# Altium PCB ver40mil_2023-06-10.pcbdoc
Units mil, origin at the board's own origin, x right, y up, seen from the top; angles counter-clockwise.
Board outline 4425 x 3222.33 mil, 2 copper layers (Top Layer, Bottom Layer); 20 components, 23 nets, 98 pads, 10 vias.
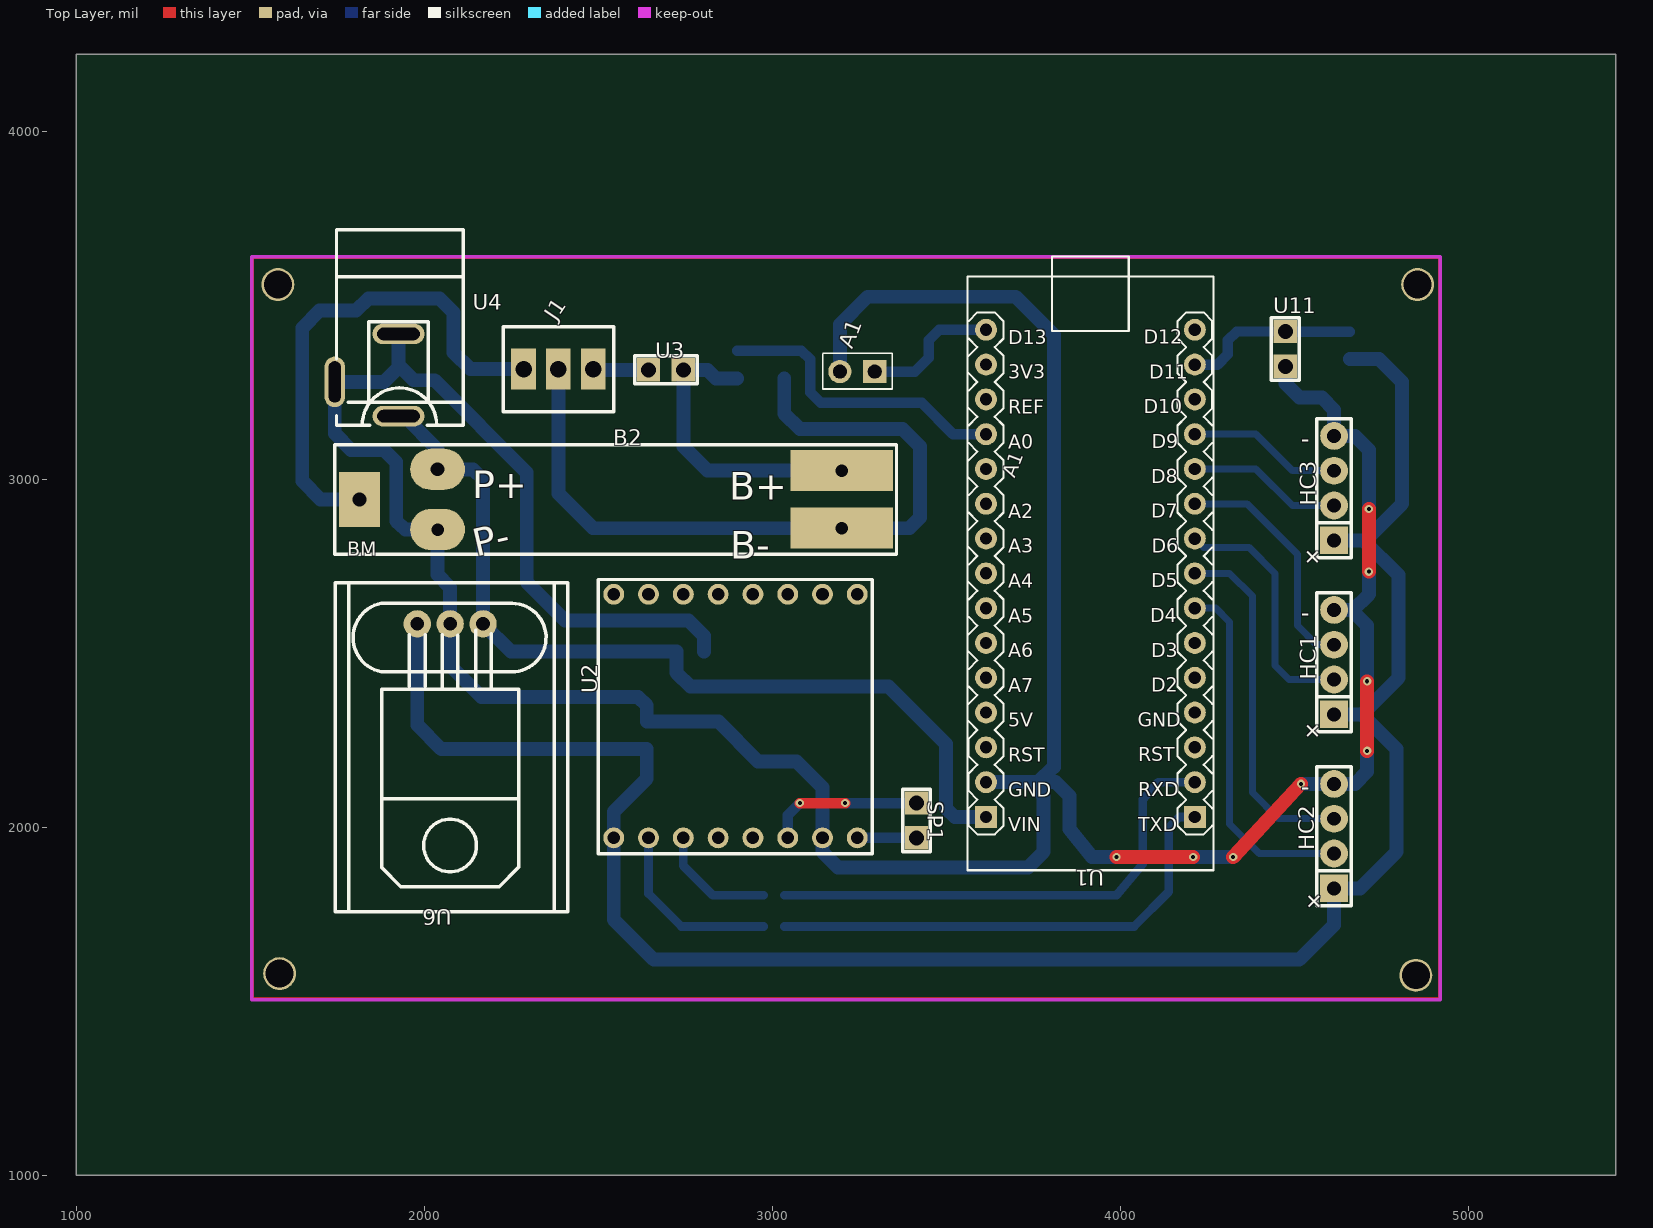
[diagram p0: Top Layer view]
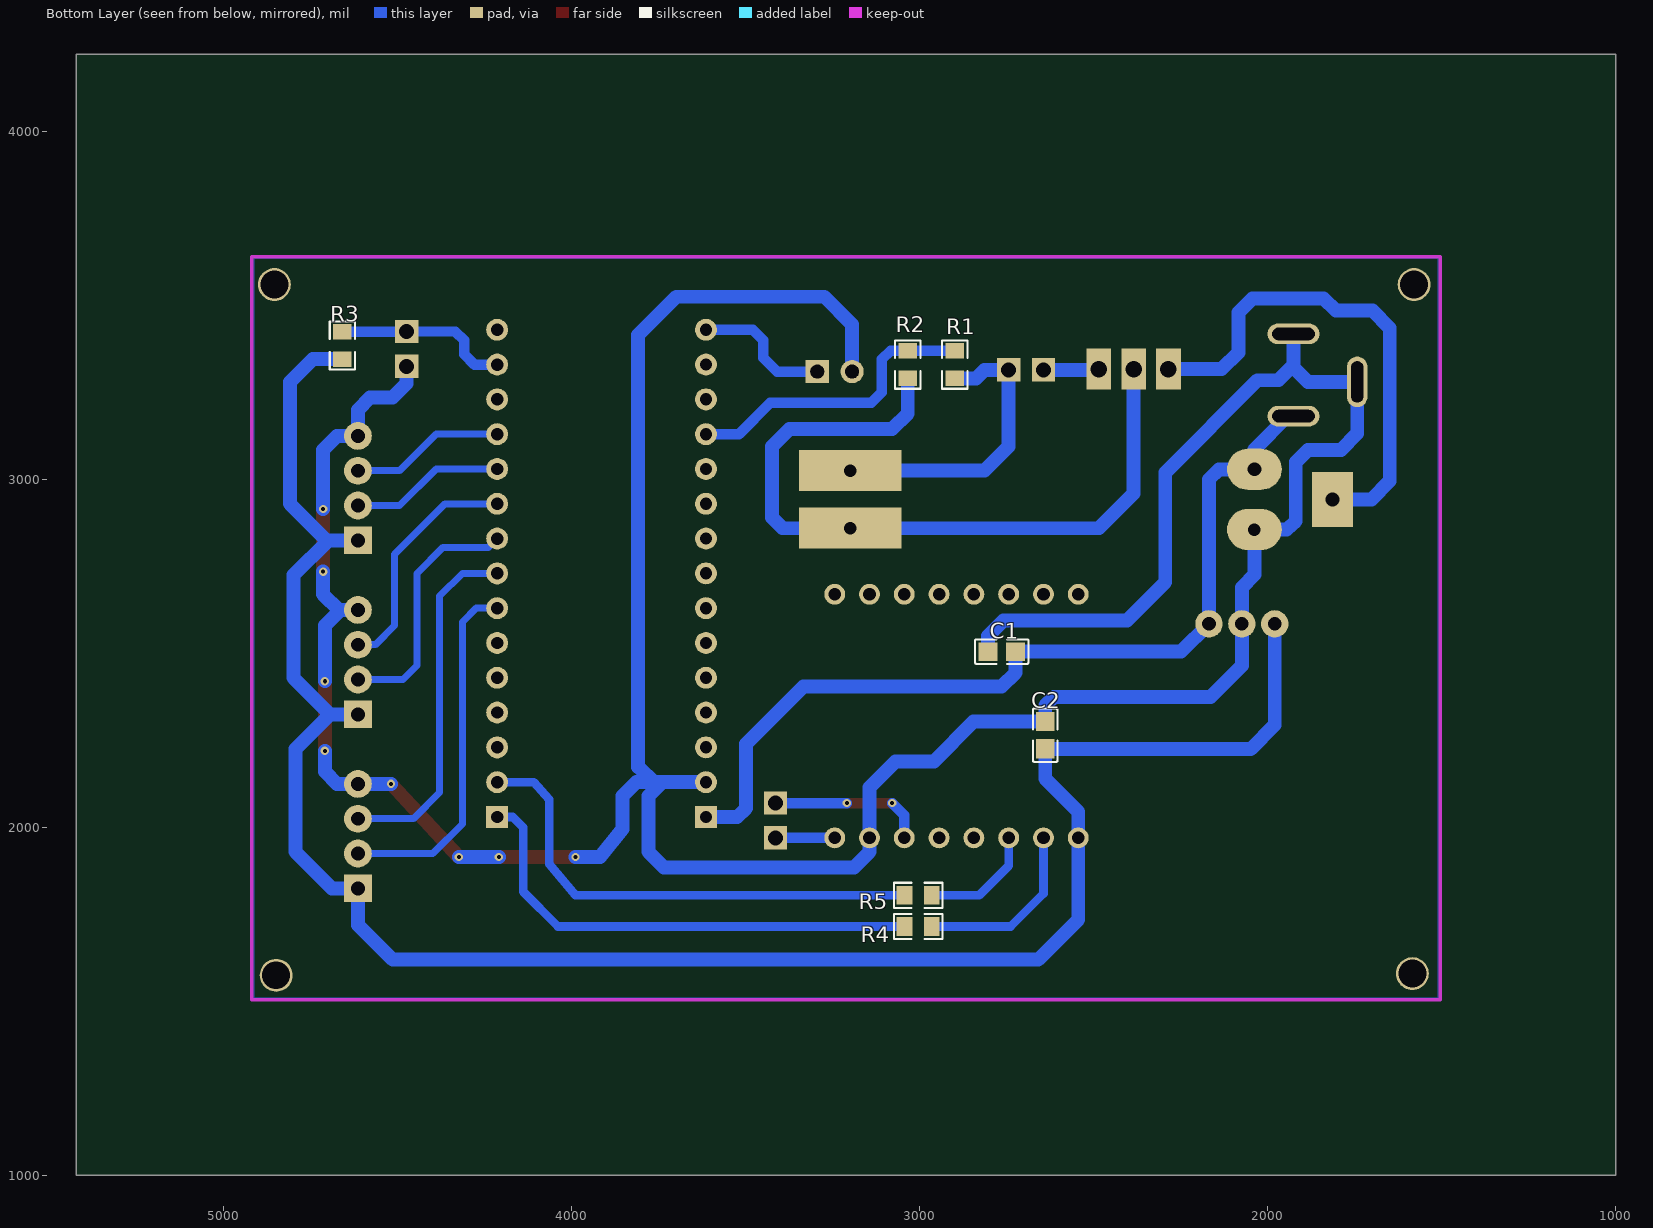
[diagram p1: Bottom Layer view, seen from below]

## Layer stack, top to bottom
Top Layer: signal copper (thickness not stored)
Dielectric: dielectric 12.6, FR-4, Dk 4.8
Bottom Layer: signal copper (thickness not stored)

## Board outline
5425,1000 1000,1000 1000,4222.33 5425,4222.33

## Components (designator, comment, footprint, x,y, rotation, side; value= is the part's Value field where it differs from the comment)
A1 "DCmotor" CONNECTOR_PINHEADER_2.54MM:PINHEADER_1X11_P_2.54MM 3295,3310 r270 top
B2 "Batery Charge Protection HX-2S-A10" HX-2S-A10 1743.45,3100 r0 top
C1 "10u" C0805 2765,2505 r0 bottom
C2 "0.1u" C0805 2640,2265 r90 bottom
HC1 "SR04" JSN-SR04T-3.0_1H 4615,2365 r90 top
HC2 "SR04" JSN-SR04T-3.0_1H 4615,1865 r90 top
HC3 "SR04" JSN-SR04T-3.0_1H 4615,2865 r90 top
J1 "TERM BLK 3P SIDE" "PHOENIX TERM BLK 3P SIDE ENT 2.54MM PCB" 2545,3195 r180 top
R1 "30K" R0805 2900,3330 r90 bottom
R2 "7.5K" R0805 3035,3330 r270 bottom
R3 "4.3K" R0805 4660,3385 r270 bottom
R4 "1k" R0805 3005,1715 r180 bottom
R5 "1k" R0805 3005,1805 r180 bottom
SP1 "5" HEADER 3455,2110 r270 top
U1 "ARDUINO_NANO" COMM-TH_ARDUINO_NANO 3915,2730 r270 top
U2 "DFPlayermini2" DFPLAYER 2895,2320 r90 top
U3 "button" HEADER 2605,3355 r0 top
U4 "POWER-JACK" DC-IN-TH_POWER-JACK 1835,3300 r270 top
U6 "LM7805EEx" LM7805 2075,2585 r180 top
U11 "button" HEADER 4515,3465 r270 top

## Footprints (in the part's own frame and the unit in brackets; to place one, negate y for a bottom-side part, rotate by r counter-clockwise, add the part's x,y. Pads: shape width x height; smd on the part's side, far side on the other; paste and mask are expansions set on the pad)
C0805 [mm]
  rect 1.41x1.35 smd: 1(1,0) 2(-1,0)
  silkscreen extent -1.96,-0.9 1.96,0.9
COMM-TH_ARDUINO_NANO [mm]
  rect 1.6x1.6 hole 0.9: 1(17.78,7.62) 30(17.78,-7.62)
  round 1.6 hole 0.9: 2(15.24,7.62) 3(12.7,7.62) 4(10.16,7.62) 5(7.621,7.62) 6(5.08,7.62) 7(2.541,7.62) 8(0,7.62) 9(-2.539,7.62) 10(-5.08,7.62) 11(-7.619,7.62) 12(-10.16,7.62) 13(-12.699,7.62) 14(-15.24,7.62) 15(-17.78,7.62) 16(-17.78,-7.62) 17(-15.241,-7.62) 18(-12.7,-7.62) 19(-10.161,-7.62) 20(-7.62,-7.62) 21(-5.081,-7.62) 22(-2.54,-7.62) 23(-0.001,-7.62) 24(2.54,-7.62) 25(5.079,-7.62) 26(7.62,-7.62) 27(10.159,-7.62) 28(12.7,-7.62) 29(15.24,-7.62)
  silkscreen extent -23.11,-8.97 21.67,8.97
CONNECTOR_PINHEADER_2.54MM:PINHEADER_1X11_P_2.54MM [mm]
  rect 1.7x1.7 hole 1 slot 1.005 at 0 deg: 1(0,0)
  round 1.7 hole 1 slot 1.005 at 0 deg: 2(0,-2.54)
  silkscreen extent -1.33,-3.8 1.27,1.27
DC-IN-TH_POWER-JACK [mm]
  oval 1.5x3.8 hole 0.9 slot 3.1 at 90 deg: 1(3.001,2.325) 2(-2.999,2.325)
  oval 3.7x1.5 hole 0.9 slot 3 at 0 deg: 3(0.5,-2.325)
  silkscreen extent -10.6,-2.2 3.65,7.05
DFPLAYER [mil]
  round 60 hole 36: 1(-350,350) 2(-350,250) 3(-350,150) 4(-350,50) 5(-350,-50) 6(-350,-150) 7(-350,-250) 8(-350,-350) 9(350,350) 10(350,250) 11(350,150) 12(350,50) 13(350,-50) 14(350,-150) 15(350,-250) 16(350,-350)
  silkscreen extent -395,-392 392,395
HEADER [mil]
  rect 66.93x66.93 hole 43.31: 1(40,-40) 2(140,-40)
  silkscreen extent 0,-80 180,0
HX-2S-A10 [mm]
  oval 4x3 hole 1: 1(7.5,-1.8)
  rect 3x4 hole 1: 2(1.8,-4)
  oval 4x3 hole 0.914: 3(7.5,-6.2)
  rect 7.5x3 hole 0.914: 4(37,-1.9) 5(37,-6.1)
  silkscreen extent 0,-8 41,0
JSN-SR04T-3.0_1H [mil]
  rect 80x80 hole 40: 1(-40,0)
  round 80 hole 40: 2(60,0) 3(160,0) 4(260,0)
  silkscreen extent -90,-50 310,50
LM7805 [mm]
  round 2 hole 1: 1(-2.4,0) 2(0,0) 3(2.4,0)
  silkscreen extent -8.6,-3 8.4,21
"PHOENIX TERM BLK 3P SIDE ENT 2.54MM PCB" [mm]
  rect 1.8x3 hole 1.199: 1(1.5,-3.1) 2(4.04,-3.1)
  rect 1.8x3 hole 1.2: 3(6.58,-3.1)
  silkscreen extent 0,-6.2 8.08,0
R0805 [mil]
  rect 44.59x54.21 smd: 1(39.37,0) 2(-39.37,0)
  silkscreen extent -69,-36 69,36

## Free pads (board coordinates)
  round 94.49 hole 80: 1(1580,3560) 1(1585,1580) 1(4850,1575) 1(4855,3560)

## Via types
v1: diameter 24, hole 12, Top Layer to Bottom Layer, tented both sides, 10 vias

## Nets (pads, with @x,y where several pads share a name; then routed paths per layer and width w, separated by ;. In a path a pad name is that pad's centre, name@x,y a point inside that pad or via, vN(x,y) a via of type N, cw(c..) or ccw(c..) an arc to the next point about the centre after c; other vN are vias at no path point)
A0: R1.1 R2.2 U1.19 | length 869.5
  Bottom Layer w30: R1.1 R2.2 ; R2.2 3084.4,3369.4 3110,3345 3110,3250 3140,3220 3430,3220 3520,3130 U1.19
B+: B2.4 R1.2 U3.2 | length 869.1
  Bottom Layer w40: R1.2 2839.4,3290.6 2815,3315 U3.2 2745,3095 2814.8,3025.2 B2.4
B-: B2.5 J1.2 R2.1 | length 2185.7
  Bottom Layer w40: J1.2@2386,3317.1 2386,2959 2485.2,2859.8 B2.5 3394.8,2859.8 3425,2890 3425,3095 3375,3145 3080,3145 3035,3190 R2.1
BM: B2.2 J1.3 | length 1448.7
  Bottom Layer w40: B2.2 1702.5,2942.5 1650,2995 1650,3435 1700,3485 1805,3485 1840,3520 2045,3520 2085,3480 2085,3365 2132.9,3317.1 J1.3@2286,3317.1
D0: R5.1 U2.3 | length 345.6
  Bottom Layer w25: U2.3 2745,1890 2830,1805 R5.1@2975.34,1805
D1: R4.1 U2.2 | length 529.7
  Bottom Layer w25: U2.2 2645,1810 2740,1715 R4.1@2975.34,1715
D11: R3.2 U1.14 U11.1 | length 508
  Bottom Layer w30: U1.14 4280,3330 4310,3360 4310,3400 4335,3425 U11.1 4475.63,3424.37 R3.2
D13: A1.1 U1.16 | length 399
  Bottom Layer w30: A1.1 3410,3310 3450,3350 3450,3400 3480,3430 U1.16
ECHO1: HC3.3 U1.12 | length 443.5
  Bottom Layer w20: U1.12 4390,3130 4495,3025 HC3.3
ECHO2: HC1.3 U1.10 | length 687.8
  Bottom Layer w20: U1.10 4365,2930 4510,2785 4510,2580 4565,2525 HC1.3
ECHO3: HC2.3 U1.8 | length 1023
  Bottom Layer w20: U1.8 4315,2730 4380,2665 4380,2100 4455,2025 HC2.3
GND: A1.2 B2.3 C1.1 C2.1 HC1.4 HC2.4 HC3.4 U1.29 U2.7 U4.2 U4.3 U6.2 U11.2 | length 10284.2
  Top Layer w40: v1(3990,1915) v1(4210,1915) ; v1(4325,1915) v1(4520,2125) ; v1(4710,2220) v1(4710,2420) ; v1(4715,2735) v1(4715,2915)
  Bottom Layer w40: B2.3 1945.9,2855.9 1920,2880 1920,3050 1885,3085 1790,3085 1743.4,3131.6 1743.4,3280.3 1884.7,3280.3 1926.5,3321.6 1926.5,3418.1 1926.5,3328.4 1970,3285 2030,3285 2295,3020 2295,2705 2405,2595 2760,2595 2804.4,2550.6 C1.1 ; B2.3 2038.73,2726.27 2075,2690 U6.2 2075,2465 2165,2375 2615,2375 2640,2350 C2.1 ; C2.1 2845.63,2304.37 2960,2190 3070,2190 3145,2115 U2.7 3145,1930 3190,1885 3735,1885 3780,1930 3780,2090 3740,2130 U1.29 3815,2130 3855,2090 3855,1995 3920,1915 v1(3990,1915) ; A1.2 3195,3445 3275,3525 3700,3525 3810,3415 3810,2173.6 3808.31,2173.6 3764.71,2130 ; v1(4210,1915) v1(4325,1915) ; U11.2 4475,3275 4515,3235 4580,3235 4615,3200 HC3.4 4675,3125 4715,3085 v1(4715,2915) ; v1(4520,2125) HC2.4 4675,2125 4710,2160 v1(4710,2220) ; v1(4710,2420) 4710,2580 4665,2625 HC1.4 4670,2625 4715,2670 v1(4715,2735)
J1_1: J1.1 U3.1 | length 159.9
  Bottom Layer w40: J1.1@2485.95,3317.05 2488,3315 U3.1
P+: B2.1 C1.2 U1.30 U4.1 U6.1 | length 2586.4
  Bottom Layer w40: U4.1@1926.5,3181.9 1943.1,3181.9 2038.7,3086.3 B2.1 2140.9,3029.1 2169.5,3000.5 U6.1 2249.5,2505 C1.2 2725.63,2444.37 2765,2405 3335,2405 3500,2240 3500,2055 3525,2030 U1.30
R4_2: R4.2 U1.1 | length 1419.2
  Bottom Layer w25: R4.2@3034.66,1715 4040,1715 4140,1815 4140,2000 4170,2030 U1.1
R5_2: R5.2 U1.2 | length 1429.8
  Bottom Layer w25: R5.2@3034.66,1805 3990,1805 4065,1895 4065,2058.9 4065,2080 4110,2130 U1.2
S$259: 
SPK1: SP1.1 U2.6 | length 449.5
  Top Layer w30: v1(3080,2070) v1(3210,2070)
  Bottom Layer w30: U2.6 3045,2035 v1(3080,2070) ; v1(3210,2070) SP1.1
SPK2: SP1.2 U2.8 | length 170
  Bottom Layer w30: U2.8 SP1.2
TRIG1: HC3.2 U1.11 | length 443.5
  Bottom Layer w20: U1.11 4390,3030 4495,2925 HC3.2
TRIG2: HC1.2 U1.9 | length 723
  Bottom Layer w20: U1.9 4240,2805 4370,2805 4445,2730 4445,2465 4485,2425 HC1.2
TRIG3: HC2.2 U1.7 | length 1031.8
  Bottom Layer w20: U1.7 4275,2630 4315,2590 4315,2010 4400,1925 HC2.2
VCC: C2.2 HC1.1 HC2.1 HC3.1 R3.1 U2.1 U6.3 | length 5943.1
  Bottom Layer w40: U6.3 1980.5,2294.5 2049.37,2225.63 C2.2 2640,2140 2545,2045 U2.1 2545,1735 2660,1620 4515,1620 4615,1720 HC2.1 4690,1825 4795,1930 4795,2225 4695,2325 ; HC3.1 4700,2825 ; R3.1 4744.37,3345.63 4810,3280 4810,2930 4705,2825 4700,2825 ; 4695,2325 HC1.1 4695,2325 ; 4695,2325 4800,2430 4800,2725 4700,2825
pads on no net: U1.3 U1.4 U1.5 U1.6 U1.13 U1.15 U1.17 U1.18 U1.20 U1.21 U1.22 U1.23 U1.24 U1.25 U1.26 U1.27 U1.28 U2.4 U2.5 U2.9 U2.10 U2.11 U2.12 U2.13 U2.14 U2.15 U2.16

## Polygon pours and split planes (outlines as drawn)
GND on Bottom Layer (solid): 1510,3635 4915,3635 4915,1510 1510,1510
GND on Top Layer (solid): 1510,3635 4915,3635 4915,1510 1510,1510

## Silkscreen, mask and mechanical layers (free items; w line width, h text height)
Bottom Solder:
  text "Bùi Minh Quân 20119270" at 3905,2245 h80 r270
  text "Vũ Quốc Việt 20119308" at 4055,2245 h80 r270

## Text inside footprints (layer, text, board x,y; h text height)
B2: Top Overlay "P+" at 2138.33,2945.83 h80; Top Overlay "P-" at 2150.09,2777.56 h80 r13; Top Overlay "BM" at 1778.88,2781.11 h39.37; Top Overlay "B+" at 2877.31,2941.89 h80; Top Overlay "B-" at 2880.07,2772.6 h80
HC1: Top Overlay "+" at 4517.32,2282.32 h50 r315; Top Overlay "-" at 4545,2630 h50 r180
HC2: Top Overlay "+" at 4522.32,1792.32 h50 r315; Top Overlay "-" at 4545,2130 h50 r180
HC3: Top Overlay "+" at 4517.32,2782.32 h50 r315; Top Overlay "-" at 4545,3130 h50 r180
U1: Top Overlay "D13" at 3679.17,3388.74 h39.37; Top Overlay "3V3" at 3679.17,3288.74 h39.37; Top Overlay "REF" at 3679.17,3188.74 h39.37; Top Overlay "A0" at 3679.17,3088.74 h39.37; Top Overlay "A1" at 3697.55,3001.38 h39.37 r69; Top Overlay "A2" at 3679.17,2888.74 h39.37; Top Overlay "A3" at 3679.17,2788.74 h39.37; Top Overlay "A4" at 3679.17,2688.74 h39.37; Top Overlay "A5" at 3679.17,2588.74 h39.37; Top Overlay "A6" at 3679.17,2488.74 h39.37; Top Overlay "A7" at 3679.17,2388.74 h39.37; Top Overlay "5V" at 3679.17,2288.74 h39.37; Top Overlay "RST" at 3679.17,2188.74 h39.37; Top Overlay "GND" at 3679.17,2088.74 h39.37; Top Overlay "VIN" at 3679.17,1988.74 h39.37; Top Overlay "D12" at 4068.5,3389.53 h39.37; Top Overlay "D11" at 4084.6,3289.53 h39.37; Top Overlay "D10" at 4068.5,3189.53 h39.37; Top Overlay "D9" at 4091.1,3089.53 h39.37; Top Overlay "D8" at 4089.3,2989.53 h39.37; Top Overlay "D7" at 4089.3,2889.53 h39.37; Top Overlay "D6" at 4091.1,2789.53 h39.37; Top Overlay "D5" at 4089.3,2689.53 h39.37; Top Overlay "D4" at 4087.5,2589.53 h39.37; Top Overlay "D3" at 4089.3,2489.53 h39.37; Top Overlay "D2" at 4089.3,2389.53 h39.37; Top Overlay "GND" at 4050.6,2289.53 h39.37; Top Overlay "RST" at 4052.4,2189.53 h39.37; Top Overlay "RXD" at 4052.4,2089.53 h39.37; Top Overlay "TXD" at 4052.4,1989.53 h39.37